# Altium PCB IRIS2_PCB_FrontPlate.PcbDoc
Units mm, origin at the board's own origin, x right, y up, seen from the top; angles counter-clockwise.
Board outline 100 x 50 mm, 4 copper layers (Top Layer, GND, Power, Bottom Layer), stack 0.568 mm thick; 20 components, 36 nets, 120 pads, 10 vias.
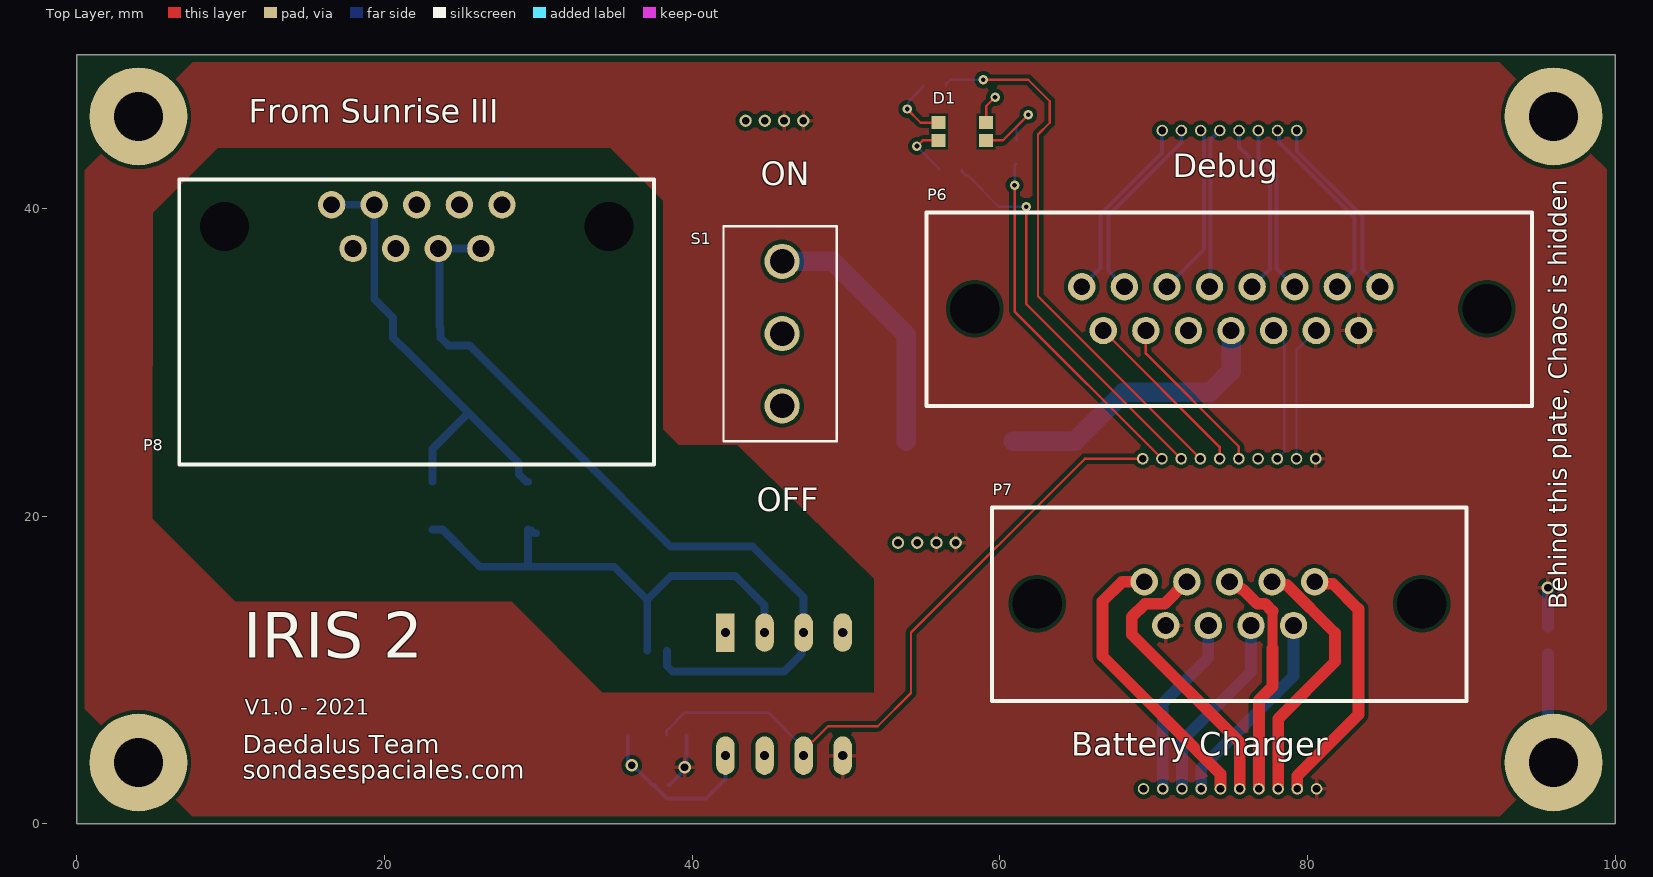
[diagram p0: Top Layer view]
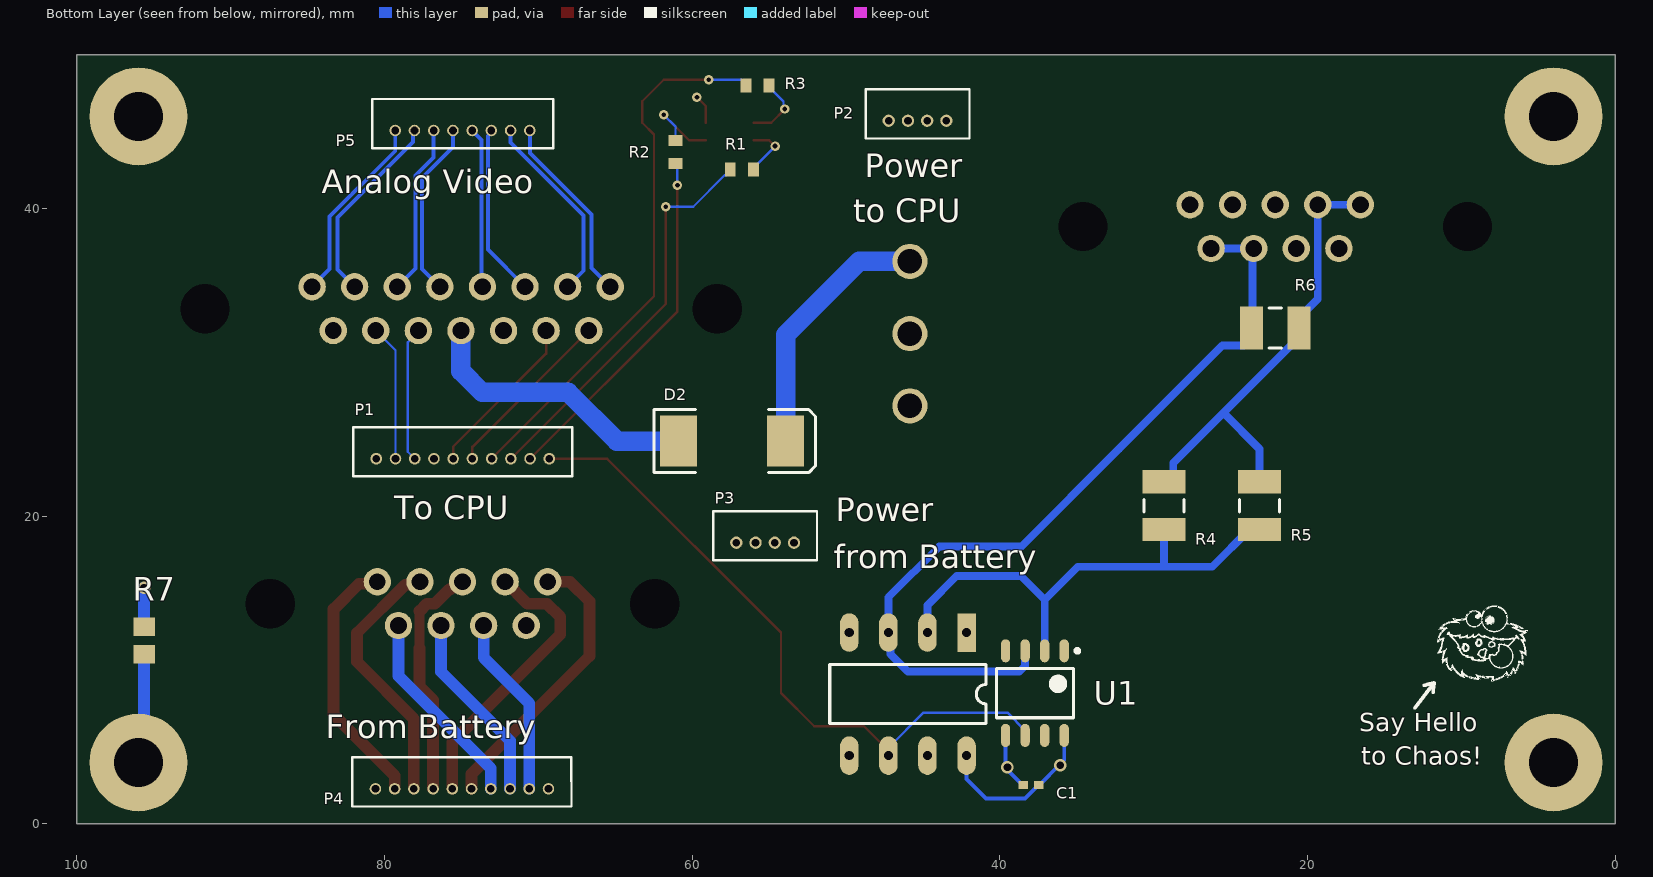
[diagram p1: Bottom Layer view, seen from below]
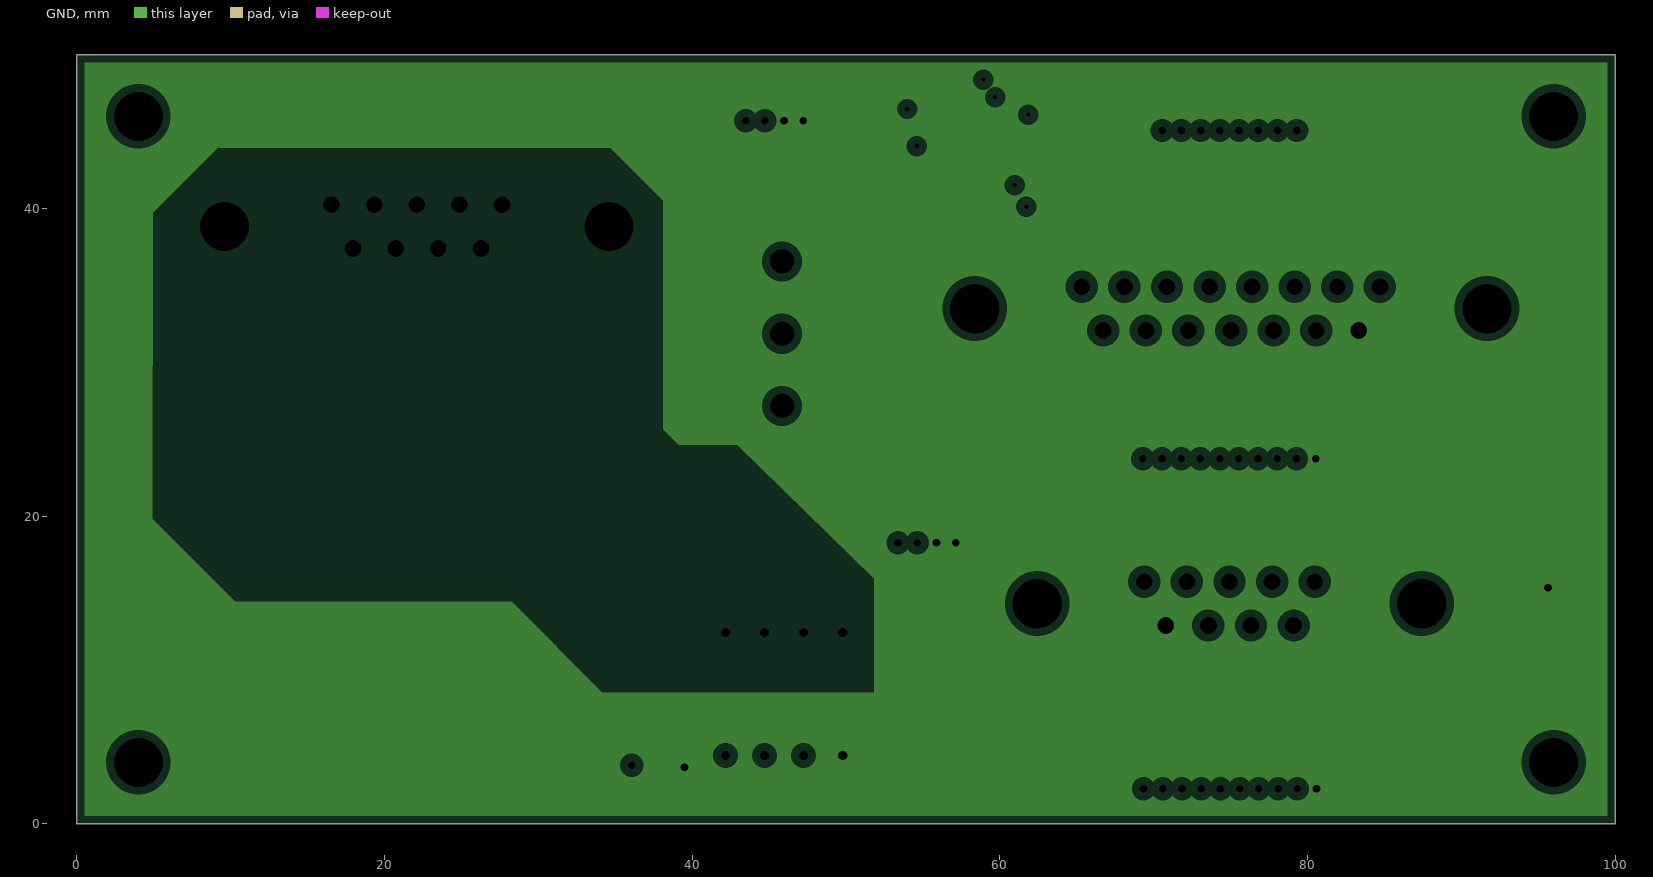
[diagram p2: GND, clearances drawn from the general rule]
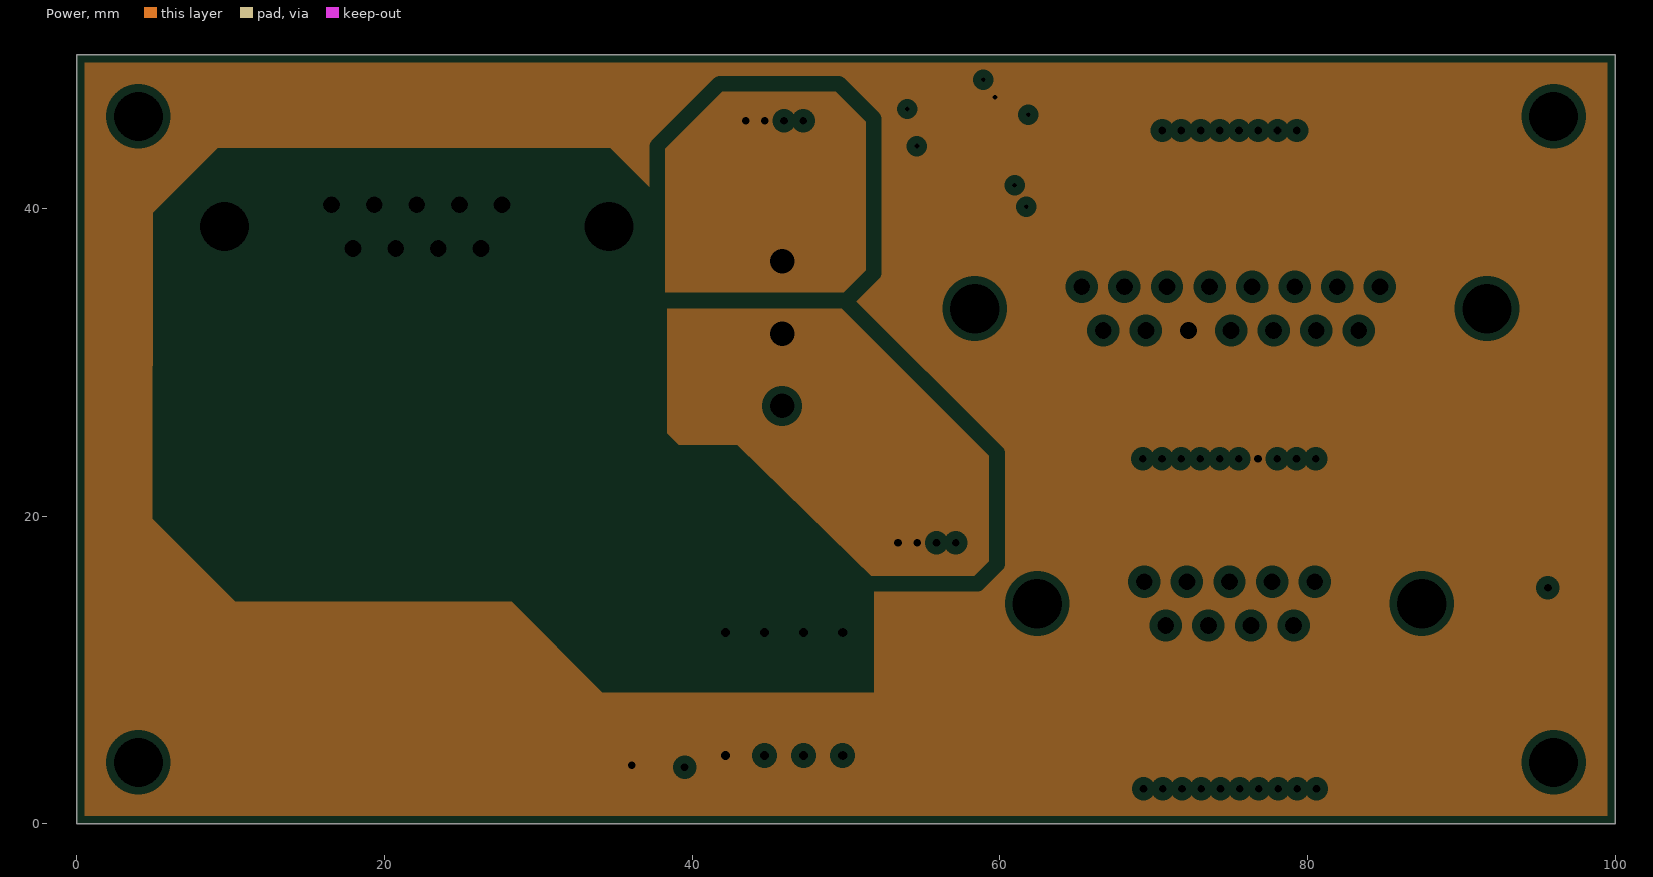
[diagram p3: Power, clearances drawn from the general rule]
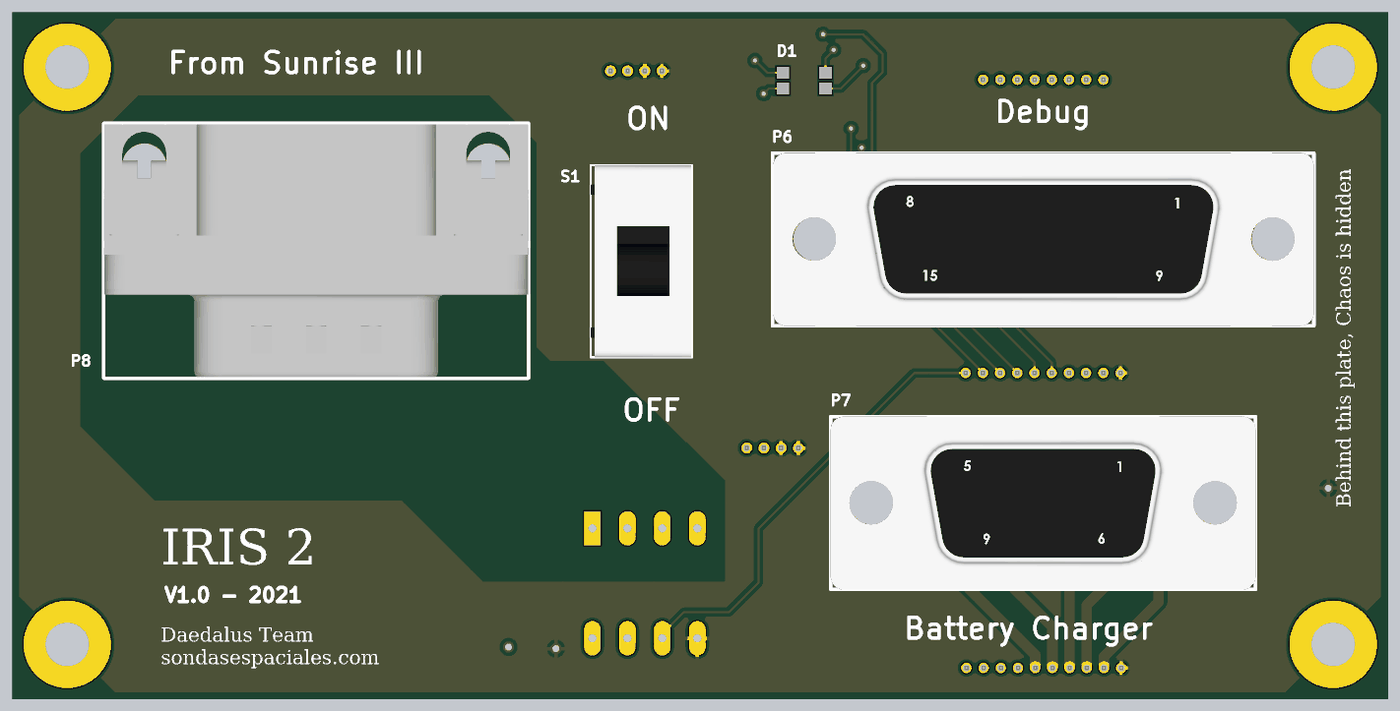
[diagram p4: 3D render of the assembled board from above, using the file's embedded part models]

## Layer stack, top to bottom
Top Solder: solder mask 0.0102, Solder Resist, Dk 3.5
Top Layer: signal copper 0.0356
Dielectric 2: prepreg 0.0711, PP-006, Dk 4.1
GND: plane copper 0.0175, net GND
Dielectric 1: dielectric 0.32, FR-4, Dk 4.8
Power: plane copper 0.0175, net 3V3
Dielectric 3: prepreg 0.0711, PP-006, Dk 4.1
Bottom Layer: signal copper 0.0356
Bottom Solder: solder mask 0.0102, Solder Resist, Dk 3.5

## Board outline
0,0 0,50 100,50 100,0

## Design rules (kind name [scope] priority, off if disabled: settings)
Clearance [All] p1: gap=0.254 ignorepadtopadclearanceinfootprint=FALSE except(0: SMDPad-Hole THPad-Hole Via-Hole Fill-Hole Poly-Hole Region-Hole Text-Hole; 0.152: Arc-Arc Arc-Track Arc-SMDPad Arc-THPad Arc-Via Arc-Text Track-Track Track-SMDPad Track-THPad Track-Via Track-Text SMDPad-SMDPad SMDPad-Via SMDPad-Fill SMDPad-Poly SMDPad-Region SMDPad-Text Via-Via Fill-Text Poly-Text Region-Text; 0.305: Arc-Hole Track-Hole)
HoleSize [All] p1: absolutevalues=TRUE maxlimit=12.7 minlimit=0.025 maxpercent=80.000 minpercent=20.000
PlaneClearance [All] p1: clearance=0.508
PlaneConnect [All] p1: pad.planeconnectstyle=Relief pad.reliefexpansion=0.178 pad.reliefentries=4 pad.reliefconductorwidth=0.254 pad.reliefairgap=0.178 via.planeconnectstyle=Direct via.reliefexpansion=0.178 via.reliefentries=4 via.reliefconductorwidth=0.508 via.reliefairgap=0.178
PolygonConnect [All] p1: connectstyle=Relief reliefconductorwidth=0.254 reliefentries=4 polygonreliefangle="90 Angle" airgapwidth=0.254
RoomDefinition IRIS2_PCB_FrontPlate [InComponentClass('IRIS2_PCB_FrontPlate')] p1: confinementstyle=ConfineIn formatcopy=TRUE lockcomponents=FALSE outline 0,0 99.949,0 99.949,50.038 0,50.038
RoutingVias [All] p1: holewidth=0.711 width=1.27 viastyle="Through Hole" minholewidth=0.711 minwidth=1.27 maxholewidth=0.711 maxwidth=1.27
SolderMaskExpansion [All] p1: expansion=0.102 istentingtop=FALSE
Width [All] p1: maxlimit=1.27 minlimit=0.152 preferedwidth=0.254 minimp=50.000000 maximp=50.000000 favimp=50.000000
27 further rules are at their usual default settings.

## Components (designator, comment, footprint, x,y, rotation, side; value= is the part's Value field where it differs from the comment)
C1 "16V" 0402 37.973,2.54 r0 bottom value=100nF
D1 "RGB LED" PCBComponent_1 56.007,45.593 r0 top
D2 "Diode" SMC 57.404,24.892 r180 bottom
P1 "Picoblade 10" 53047-1010 71.788,23.749 r0 bottom
P2 "Picoblade 4" 53047-0410 43.474,45.72 r0 bottom
P3 "Picoblade 4" 53047-0410 53.38,18.288 r0 bottom
P4 "Picoblade 10" 53047-1010 71.842,2.286 r0 bottom
P5 "Picoblade 8" 53047-0810 70.554,45.085 r0 bottom
P6 "DB15 Female" "DB15 Female 191-015-213" 84.709,34.925 r0 top
P7 "DB9 Female" "DB9 Female 191-009-213" 69.393,15.748 r0 top
P8 "DB9 Male" "DB9 Male 621-009-668-032" 16.561,40.259 r0 top
R1 "Res1" J1-0603 56.769,42.545 r180 bottom value=0
R2 "Res1" J1-0603 61.087,43.688 r270 bottom value=0
R3 "Res1" J1-0603 55.753,48.006 r180 bottom value=0
R4 "Res2" C1210_M 29.337,20.701 r270 bottom value=2K7
R5 "Res2" C1210_M 23.114,20.701 r270 bottom value=DNP
R6 "Res2" C1210_M 22.098,32.258 r0 bottom value=DNP
R7 "Res1" 6-0805_N 95.631,11.938 r270 bottom value=20M
S1 "SW-SPDT" CS12ANW03 45.847,31.877 r90 top
U1 "TLP2962" SOIC127P600X135-8N 37.719,8.508 r270 bottom

## Footprints (in the part's own frame and the unit in brackets; to place one, negate y for a bottom-side part, rotate by r counter-clockwise, add the part's x,y. Pads: shape width x height; smd on the part's side, far side on the other; paste and mask are expansions set on the pad)
6-0805_N [mm] "Chip Resistor, Body 2.0x1.2mm, IPC Medium Density"
  rect 1.2x1.4 smd: 1(-0.9,0) 2(0.9,0)
  body extent -1.07,-0.7 1.07,0.7, height 0.7
0402 [mm] "Chip Capacitor, Body 1.0x0.5mm, IPC High Density"
  rect 0.6x0.5 smd: 1(-0.5,0) 2(0.5,0)
  body extent -0.55,-0.3 0.55,0.3, height 1.3
53047-0410 [mm] "Molex_Picoblade_4pin_53047-0410"
  round 0.8 hole 0.5: 1(3.75,0) 2(2.5,0) 3(1.25,0) 4(0,0)
  silkscreen extent -1.5,-2.05 5.25,1.15, body extent -1.5,-2.05 5.25,1.15, height 4.23
53047-0810 [mm] "Molex 0530470810"
  round 0.75 hole 0.5: 1(8.75,0) 2(7.5,0) 3(6.25,0) 4(5,0) 5(3.75,0) 6(2.5,0) 7(1.25,0) 8(0,0)
  silkscreen extent -1.52,-2.05 10.25,1.15, body extent -1.51,-2.05 10.24,1.15, height 4.25
53047-1010 [mm] "Molex_Picoblade_10pin_530471010"
  round 0.75 hole 0.5: 1(8.75,0) 2(7.5,0) 3(6.25,0) 4(5,0) 5(3.75,0) 6(2.5,0) 7(1.25,0) 8(0,0) 9(-1.25,0) 10(-2.5,0)
  silkscreen extent -3.99,-2.05 10.25,1.15, body extent -4,-2.05 10.25,1.15, height 4.25
C1210_M [mm] "Chip Capacitor, Body 3.2x2.5mm, IPC Low Density"
  rect 1.5x2.8 smd: 1(-1.55,0) 2(1.55,0)
  silkscreen extent -0.4,-1.3 0.4,1.3, body extent -1.7,-1.35 1.7,1.35, height 1.5
CS12ANW03 [mil] "NKKSWITCHES_CS12ANW03"
  round 90 hole 63: 1(-185,0) 2(0,0) 3(185,0)
  silkscreen extent -275,-140 275,150, body extent -276,-138 276,150, height 537
"DB9 Female 191-009-213" [mil] "191-009-213"
  round 70 hole 43: 1(436,0) 2(327,0) 3(218,0) 4(109,0) 5(0,0) 6(382,-112) 7(273,-112) 8(164,-112) 9(55,-112)
  round 0 hole 126: ""(-274,-56) ""(710,-56)
  silkscreen extent -390,-305 825,190, body extent -390,-306 825,190, height 482
"DB9 Male 621-009-668-032" [mil] "621-009-668-032 EDAC"
  round 70 hole 43: 1(0,0) 2(109,0) 3(218,0) 4(327,0) 5(436,0) 6(55,-112) 7(164,-112) 8(273,-112) 9(382,-112)
  round 0 hole 126: ""(-274,-56) ""(710,-56)
  silkscreen extent -390,-665 825,65, body extent -390,-662 826,62, height 497
"DB15 Female 191-015-213" [mil] "191-015-213"
  round 70 hole 43: 1(0,0) 2(-109,0) 3(-218,0) 4(-327,0) 5(-436,0) 6(-545,0) 7(-654,0) 8(-763,0) 9(-54,-112) 10(-163,-112) 11(-272,-112) 12(-381,-112) 13(-490,-112) 14(-599,-112) 15(-708,-112)
  round 0 hole 126: ""(-1037,-56) ""(274,-56)
  silkscreen extent -1160,-305 389,190, body extent -1158,-305 389,190, height 482
J1-0603 [mm] "Chip Resistor, Body 1.6x0.8mm, IPC High Density"
  rect 0.7x0.9 smd: 1(-0.75,0) 2(0.75,0)
  body extent -0.85,-0.48 0.85,0.48, height 0.9
PCBComponent_1 [mm]
  rect 0.9x0.85 smd: 1(0,0) 2(0,-1.15) 3(3.1,-1.15) 4(3.1,0)
  body extent -0.03,-1.23 3.15,0.04, height 0.8
SMC [mm] "DO-214-AB/SMC; 2 C-Bend Leads; Body 7.9 x 5.9 mm, inc. leads (LxW)"
  rect 2.4x3.3 smd: 1(-3.475,0) 2(3.475,0)
  silkscreen extent -5.07,-2.05 5.43,2.05
SOIC127P600X135-8N [mm] "SOIC, 8-Leads, Body 4,90x3,90mm, Pitch 1,27mm, IPC Medium Density"
  rect 2.5x1.2 hole 0.6: 1(-3.937,-4.445)
  oval 1.5x0.6 smd: 1(-2.75,1.905) 2(-2.75,0.635) 3(-2.75,-0.635) 4(-2.75,-1.905) 5(2.75,-1.905) 6(2.75,-0.635) 7(2.75,0.635) 8(2.75,1.905)
  oval 2.5x1.2 hole 0.6: 2(-3.937,-6.985) 3(-3.937,-9.525) 4(-3.937,-12.065) 5(4.063,-12.065) 6(4.063,-9.525) 7(4.063,-6.985) 8(4.063,-4.445)
  silkscreen extent -2.87,-13.33 1.98,2.88, body extent -2,-2.5 2,2.5, height 1.35

## Part data
C1: library part Cap, "Capacitor", Manufacturer=Murata, LatestRevisionDate=17-Jul-2002, LatestRevisionNote="Re-released for DXP Platform.", PackageDescription="Radial Cap, Thru-Hole; 2 Leads; 0.3 in Pin Spacing", PackageReference=RAD-0.3, Published=8-Jun-2000, Publisher="Altium Limited", Reference=GCM155R71C104KA55D
D1: Manufacturer="Wurth Elektronik", Reference=156125M173000
D2: "Default Diode", Code_JEDEC=DO-214-AB, LatestRevisionDate=17-Jul-2002, LatestRevisionNote="Re-released for DXP Platform.", PackageDescription="DO-214-AB/SMC; 2 C-Bend Leads; Body 7.9 x 5.9 mm, inc. leads (LxW)", PackageReference=SMC, PackageVersion=Sep-1996, Published=8-Jun-2000, Publisher="Altium Limited"
P1 P4: library part "Header 10", "Header, 10-Pin", Manufacturer=Molex, Reference=530471010
P2 P3: library part "Header 4", "Header, 4-Pin", Manufacturer=Molex, LatestRevisionDate=17-Jul-2002, LatestRevisionNote="Re-released for DXP Platform.", Publisher="Altium Limited", Reference=0530470410
P5: library part "Header 8", "Header, 8-Pin", Manufacturer=Molex, Reference=0530470810
P6: library part "Header 15", "Header, 15-Pin", Manufacturer=NorComp, Reference=191-015-223R001
P7: library part "Header 9", "Header, 9-Pin", Manufacturer=NorComp, Reference=191-009-113L551
P8: library part "Header 9", "Header, 9-Pin", Manufacturer=EDAC, Reference=621-009-668-032
R1 R2 R3: "Resistor", Manufacturer=Panasonic, LatestRevisionDate=17-Jul-2002, LatestRevisionNote="Re-released for DXP Platform.", PackageDescription="Axial Device, Thru-Hole; 2 Leads; 0.3 in Pin Spacing", PackageReference=AXIAL-0.3, Published=8-Jun-2000, Publisher="Altium Limited", Reference=ERJ-3GEY0R00V
R4: "Resistor", Manufacturer="TE Connectivity", Foot=1210/3225, Reference=CRGP1210F2K7
R5 R6: "Resistor", Foot=1210/3225
R7: "Resistor", Manufacturer=KOA, Supplier Part Number 1=667-ERJ-2RKF1002X, LatestRevisionDate=17-Jul-2002, LatestRevisionNote="Re-released for DXP Platform.", PackageDescription="Axial Device, Thru-Hole; 2 Leads; 0.3 in Pin Spacing", PackageReference=AXIAL-0.3, Publisher="Altium Limited", Reference=RK73B2ATTD206J, Supplier 1=Mouser
S1: "SPDT Subminiature Toggle Switch, Right Angle Mounting, Vertical Actuation", Manufacturer="NKK Switches", ComponentLink1Description="Manufacturer Link", ComponentLink1URL=http://www.apem.com, Reference=CS12ANW03
U1: "Optocoupler", Manufacturer=Toshiba, Foot=SMD-8, Reference=TLP2962(TP1,F)

## Free pads (board coordinates)
  round 6.35 hole 3.175: 1(4,4) 1(4,46) 1(96,4) 1(96,46)

## Via types
v1: diameter 0.615, hole 0.31, Top Layer to Bottom Layer, tented both sides, 7 vias
v2: diameter 0.813, hole 0.5, Top Layer to Bottom Layer, tented both sides, 3 vias

## Nets (pads, with @x,y where several pads share a name; then routed paths per layer and width w, separated by ;. In a path a pad name is that pad's centre, name@x,y a point inside that pad or via, vN(x,y) a via of type N, cw(c..) or ccw(c..) an arc to the next point about the centre after c; other vN are vias at no path point)
3V3: C1.1 D1.4 P1.4 P6.13 U1.8 | length 13
  Top Layer w0.152: D1.4 59.107,46.661 v1(59.69,47.244)
  Bottom Layer w0.254: U1.8@35.814,5.758 35.814,4.149 36.11,3.852 37.423,2.54 37.523,2.54 37.646,2.417 37.646,2.367 38.362,1.651 40.894,1.651 42.164,2.921 U1.8@42.164,4.445
  other v2: 36.068,3.81
Batt_Cell_01: P4.2 P7.1 | length 16.9
  Top Layer w0.508: P7.1 P7.1@80.593,15.622
  Top Layer w0.762: P4.2 79.342,3.142 83.312,7.112 83.312,13.97 81.66,15.622 P7.1@80.593,15.622
Batt_Cell_02: P4.3 P7.2 | length 17.1
  Top Layer w0.762: P7.2 77.893,15.554 78.65,15.554 81.788,12.416 81.788,10.541 78.092,6.845 P4.3
Batt_Cell_03: P4.4 P7.3 | length 15.5
  Top Layer w0.635: 77.724,11.43 77.724,13.843
  Top Layer w0.762: P7.3 75.205,15.748 75.689,15.264 75.795,15.264 76.733,14.326 77.241,14.326 77.724,13.843 ; P4.4 76.842,8.053 77.724,8.935 77.724,11.43
Batt_Cell_04: P4.5 P7.4 | length 19
  Top Layer w0.508: P7.4 P7.4@72.404,15.505
  Top Layer w0.762: P7.4 72.133,15.748 70.71,14.326 69.444,14.326 68.58,13.462 68.58,12.319 75.592,5.307 P4.5
Batt_Cell_05: P4.6 P7.5 | length 18.6
  Top Layer w0.762: P7.5 67.945,15.748 66.675,14.478 66.675,10.922 74.342,3.255 P4.6
Batt_Cell_06: P4.7 P7.6 | length 13.1
  Bottom Layer w0.762: P4.7 73.092,3.623 79.096,9.627 P7.6
Batt_Cell_07: P4.8 P7.7 | length 12.5
  Bottom Layer w0.762: P4.8 71.842,5.421 76.327,9.906 P7.7
Batt_Cell_08: P4.9 P7.8 | length 11.8
  Bottom Layer w0.762: P4.9 70.592,7.854 73.558,10.82 P7.8
CHASSIS: pad.1@96,4 R7.2 | length 7.2
  Bottom Layer w0.762: R7.2 95.631,4.369 pad.1@96,4
"External Vin": D2.1 P6.12 | length 18.7
  Bottom Layer w1.27: D2.1 64.897,24.892 68.072,28.067 73.66,28.067 75.032,29.439 P6.12
GND: C1.2 P1.1 P2.1 P2.2 P3.1 P3.2 P4.1 P6.9 P7.9 R7.1 U1.5 | length 6.3
  Bottom Layer w0.254: C1.2 38.523,2.54 39.39,3.407 39.39,3.576 39.624,3.81 U1.5@39.624,5.758
  Bottom Layer w0.762: R7.1 v2(95.631,15.367)
  other v2: 39.507,3.693
"LED B": P1.9 R2.2 | length 23.2
  Top Layer w0.152: v1(60.96,41.529) 60.96,33.327 P1.9
  Bottom Layer w0.152: v1(60.96,41.529) 60.96,42.811 R2.2
"LED G": P1.8 R1.1 | length 25.8
  Top Layer w0.152: v1(61.722,40.132) 61.722,33.815 P1.8
  Bottom Layer w0.152: R1.1 57.519,42.445 57.793,42.171 57.893,42.171 59.932,40.132 v1(61.722,40.132)
"LED R": P1.7 R3.1 | length 35.5
  Top Layer w0.152: v1(58.928,48.387) 61.849,48.387 63.246,46.99 63.246,45.593 62.484,44.831 62.484,34.303 P1.7
  Bottom Layer w0.152: R3.1 56.503,48.106 56.777,48.38 58.921,48.38 v1(58.928,48.387)
NetD1_1: D1.1 R3.2 | length 4.4
  Top Layer w0.152: v1(53.975,46.482) 54.864,45.593 D1.1
  Bottom Layer w0.152: v1(53.975,46.482) 54.063,46.57 54.063,46.966 55.003,47.906 R3.2
NetD1_2: D1.2 R1.2 | length 3.7
  Top Layer w0.152: v1(54.61,44.069) 54.62,44.069 54.994,44.443 D1.2
  Bottom Layer w0.152: v1(54.61,44.069) 54.61,44.054 56.019,42.645 R1.2
NetD1_3: D1.3 R2.1 | length 5.4
  Top Layer w0.152: D1.3 60.191,44.443 v1(61.849,46.101)
  Bottom Layer w0.152: R2.1 61.087,45.339 v1(61.849,46.101)
NetP8_1: P8.1 P8.2 R4.1 R5.1 R6.1 | length 30.5
  Bottom Layer w0.508: P8.1 P8.2 19.329,34.127 20.548,32.908 R6.1 20.548,31.608 21.044,31.112 21.084,31.112 25.463,26.733 ; R5.1 23.114,24.384 25.463,26.733 ; R4.1 29.227,22.251 28.731,22.747 28.731,23.465 25.463,26.733
NetP8_8: P8.8 P8.9 R6.2 U1.3 | length 53.3
  Bottom Layer w0.508: P8.9 P8.8 23.571,37.338 23.571,32.334 R6.2 23.648,31.611 24.144,31.115 25.527,31.115 32.258,24.384 38.608,18.034 43.942,18.034 47.244,14.732 47.244,12.445 47.112,12.313 47.112,11.044 45.974,9.906 38.735,9.906 38.354,10.287 U1.3@38.354,11.258
NetR4_2: R4.2 R5.2 U1.2 | length 33.1
  Bottom Layer w0.508: R5.2 23.764,19.151 26.187,16.728 29.337,16.728 ; R4.2 R4.2@29.337,18.897 ; R4.2@29.86,18.897 29.733,18.897 29.535,19.095 29.464,19.024 R4.2@29.337,18.897 ; U1.2@37.084,11.258 37.084,14.569 ; U1.2@44.704,12.445 44.704,14.224 42.799,16.129 38.644,16.129 37.084,14.569 ; 29.337,16.728 R4.2@29.337,18.897 ; 29.337,16.728 34.925,16.728 37.084,14.569
SBWTCK: P1.6 P6.15 | length 11.5
  Top Layer w0.152: P6.15 74.288,24.518 P1.6
SBWTDIO: P1.5 P6.14 | length 10.8
  Top Layer w0.152: P6.14 69.494,30.582 75.538,24.538 P1.5
Sunrise_CMD: P1.10 U1.6 | length 43.7
  Top Layer w0.152: U1.6@47.244,4.445 47.244,4.812 47.796,5.363 47.843,5.363 48.829,6.35 52.07,6.35 54.229,8.509 54.229,12.446 65.532,23.749 P1.10
  Bottom Layer w0.152: U1.6@38.354,5.758 38.354,6.087 39.506,7.239 44.958,7.239 47.244,4.953 U1.6@47.244,4.445
"UART Rx": P1.3 P6.11 | length 8.8
  Bottom Layer w0.152: P6.11 77.8,31.998 78.486,31.312 78.486,24.197 P1.3
"UART Tx": P1.2 P6.10 | length 8.9
  Bottom Layer w0.152: P1.2 79.288,30.799 P6.10
V_batt: P3.3 P3.4 S1.2
V_in: D2.2 P2.3 P2.4 S1.3 | length 17
  Bottom Layer w1.27: S1.3 49.149,36.576 53.929,31.796 D2.2
"Video GND 01": P5.2 P6.2 | length 12.7
  Bottom Layer w0.254: P5.2 78.149,44.99 78.149,44.339 83.058,39.43 83.058,36.043 P6.2
"Video GND 02": P5.4 P6.4 | length 11.5
  Bottom Layer w0.254: P5.4 75.554,44.013 77.572,41.996 77.572,36.093 P6.4
"Video GND 03": P5.6 P6.6 | length 11.3
  Bottom Layer w0.254: P6.6 73.279,37.338 73.279,44.726 73.054,44.951 P5.6
"Video GND 04": P5.8 P6.8 | length 12.3
  Bottom Layer w0.254: P6.8 66.548,36.144 66.548,39.624 70.554,43.63 P5.8
"Video Signal 01": P5.1 P6.1 | length 12.4
  Bottom Layer w0.254: P5.1 79.304,43.759 83.566,39.497 83.566,36.068 P6.1
"Video Signal 02": P5.3 P6.3 | length 11.1
  Bottom Layer w0.254: P5.3 76.804,43.338 77.978,42.164 77.978,36.119 P6.3
"Video Signal 03": P5.5 P6.5 | length 10.4
  Bottom Layer w0.254: P6.5 73.685,34.976 73.685,44.466 P5.5
"Video Signal 04": P5.7 P6.7 | length 12.6
  Bottom Layer w0.254: P6.7 67.056,35.966 67.056,39.557 71.804,44.306 P5.7
pads on no net: P4.10 P6. P7. P8. P8.3 P8.4 P8.5 P8.6 P8.7 S1.1 U1.1 U1.4 U1.7

## Polygon pours and split planes (outlines as drawn)
GND on Top Layer "GND_L01_P000" (solid, remove dead copper, pour order 0): 92.47,49.53 7.53,49.53 0.508,42.508 0.508,7.492 1.396,6.604 7.492,0.508 92.508,0.508 99.441,7.441 99.441,42.559
GND on GND (split plane): 99.49,0.51 0.51,0.51 0.51,49.49 99.49,49.49
3V3 on Power (split plane): 99.49,0.51 0.51,0.51 0.51,49.49 99.49,49.49
V_batt on Power (split plane): 59.307,23.919 59.307,17.102 58.336,16.131 51.632,16.131 42.926,24.638 39.116,24.638 38.356,25.398 38.356,33.526 49.7,33.526
V_in on Power (split plane): 51.306,45.636 51.306,36.025 49.827,34.546 38.229,34.546 38.229,43.858 41.994,47.623 49.319,47.623

## Other copper
Top Layer:
  pour cut-out: 9.144,43.942 4.953,39.751 4.931,19.846 10.299,14.478 28.263,14.478 34.163,8.578 51.816,8.578 51.816,15.951 42.926,24.638 39.116,24.638 38.1,25.654 38.1,40.513 34.671,43.942
Bottom Layer:
  pour cut-out: 9.144,43.942 4.953,39.751 4.931,19.846 10.299,14.478 28.263,14.478 34.163,8.578 51.816,8.578 51.816,15.951 42.926,24.638 39.116,24.638 38.1,25.654 38.1,40.513 34.671,43.942
GND (plane layer: these items are gaps in the copper):
  pour cut-out: 9.144,43.942 4.953,39.751 4.931,19.846 10.299,14.478 28.263,14.478 34.163,8.578 51.816,8.578 51.816,15.951 42.926,24.638 39.116,24.638 38.1,25.654 38.1,40.513 34.671,43.942
Power (plane layer: these items are gaps in the copper):
  pour cut-out: 9.144,43.942 4.953,39.751 4.931,19.846 10.299,14.478 28.263,14.478 34.163,8.578 51.816,8.578 51.816,15.951 42.926,24.638 39.116,24.638 38.1,25.654 38.1,40.513 34.671,43.942
  lines w1.016: 37.719,33.909 37.719,44.069 41.783,48.133 49.53,48.133 51.816,45.847 51.816,35.814 50.038,34.036 37.846,34.036 37.846,24.765 46.99,15.621 58.547,15.621 59.817,16.891 59.817,24.13 49.911,34.036

## Silkscreen, mask and mechanical layers (free items; w line width, h text height)
Top Overlay:
  text "From Sunrise III" at 11.176,45.593 h1.52
  text "Debug" at 71.247,42.037 h1.52
  text "ON" at 44.45,41.529 h1.52
  text "OFF" at 44.196,20.32 h1.52
  text "Behind this plate, Chaos is hidden" at 97.259,13.972 h2.03 r90
  text "IRIS 2" at 10.799,9.821 h5.08
  text "V1.0 - 2021" at 10.922,7.112 h1.02
  text "Battery Charger" at 64.643,4.445 h1.52
  text "Daedalus Team" at 10.797,4.208 h2.03
  text "sondasespaciales.com" at 10.795,2.563 h2.03
Bottom Overlay:
  drawing of 5 lines, arcs and shapes, not listed
  text "Power" at 48.768,42.037 h1.52
  text "Analog Video" at 84.074,41.021 h1.52
  text "to CPU" at 49.53,39.116 h1.52
  text "To CPU" at 79.375,19.812 h1.52
  text "Power" at 50.673,19.685 h1.52
  text "from Battery" at 50.8,16.637 h1.52
  text "Say Hello" at 16.639,5.628 h2.03
  text "From Battery" at 83.82,5.588 h1.52
  text "to Chaos!" at 16.51,3.446 h2.03
Mechanical 1:
  the board outline again, w0.254
Mechanical 13:
  the board outline again, w0.254